# EAGLE board boost_converter3 (EAGLE 9.6.1)
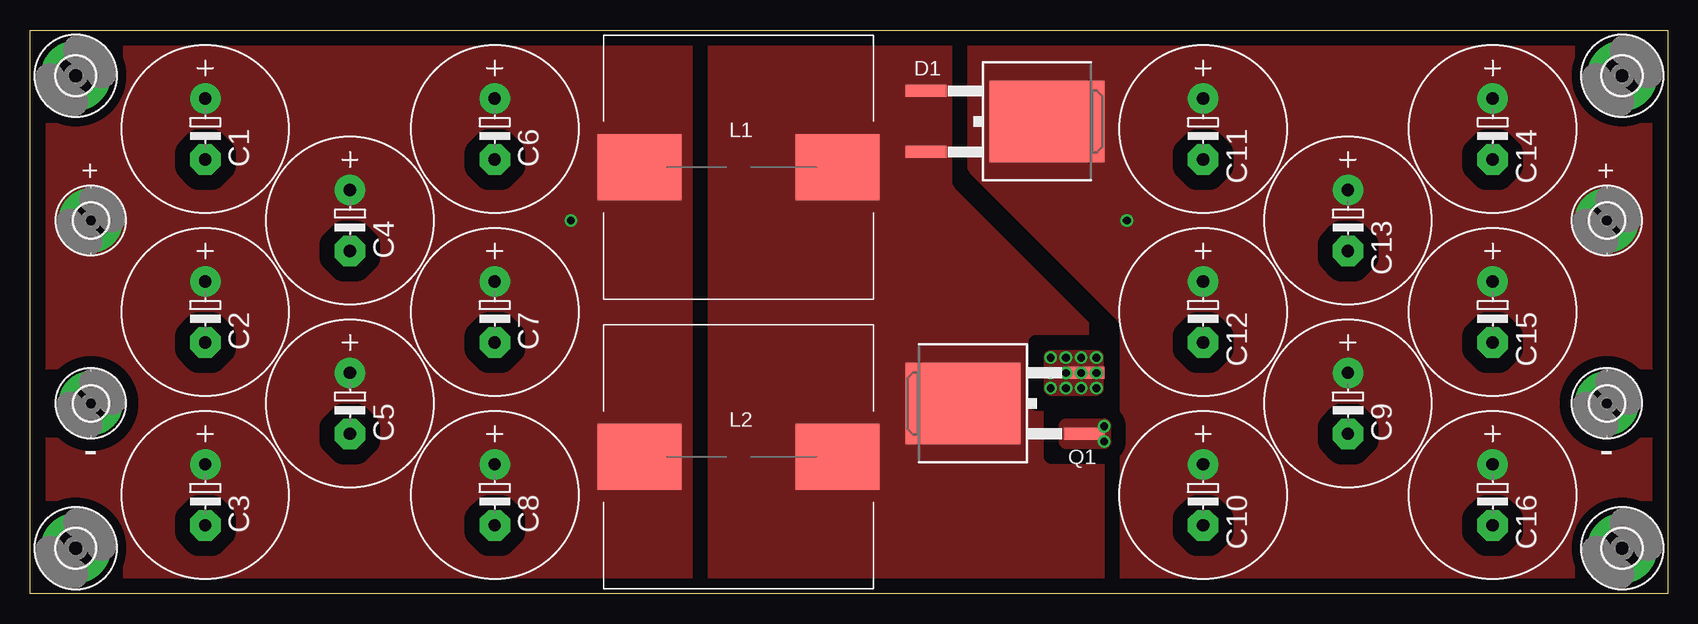
[diagram p0: board, top side]
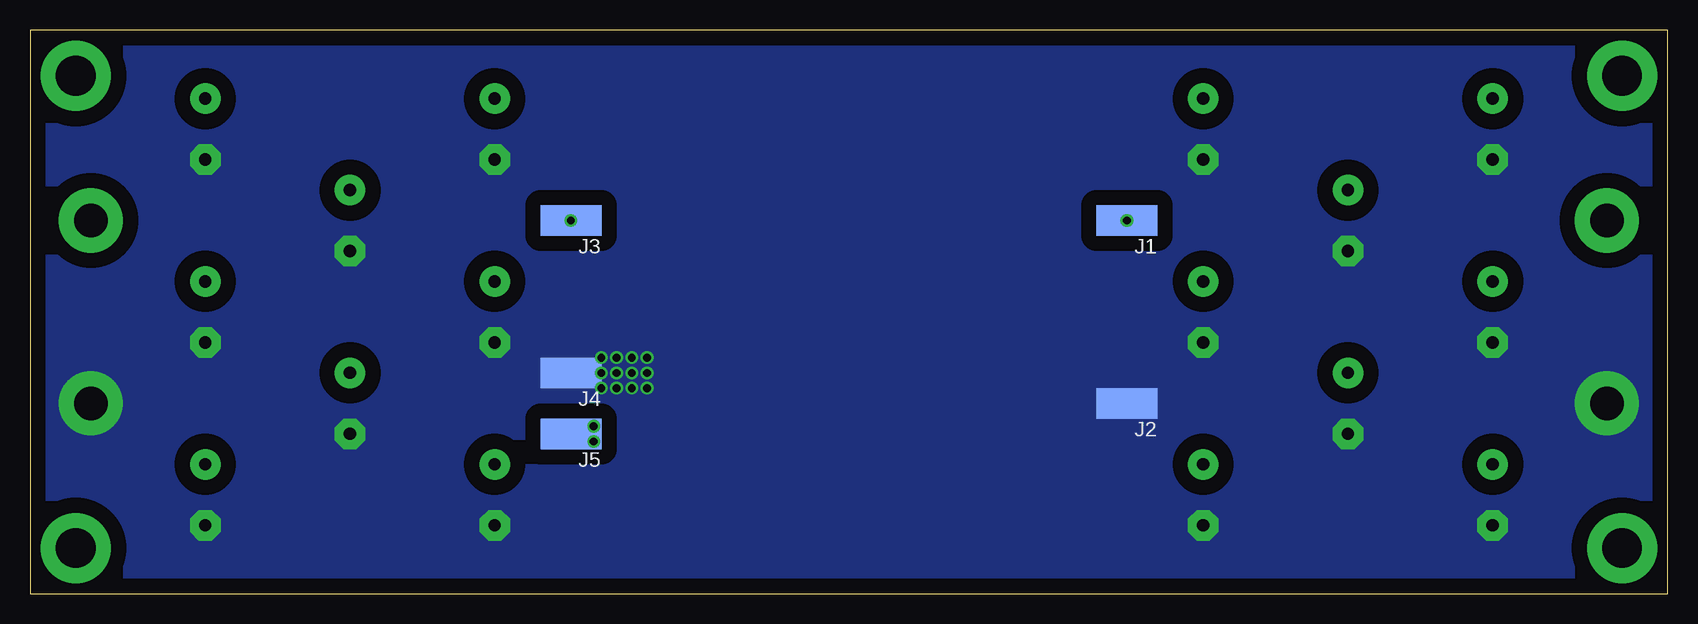
[diagram p1: board, bottom side, seen from below]

Size 136.53 x 46.99 mm. Coordinates in mm from the lower left corner, seen from the top.
Outline: 0,0 0,46.99 136.53,46.99 136.53,0 0,0
Copper layers (1*16): Top 0.035mm / dielectric 0.5mm / Bottom 0.035mm
Design rules "two_layer": minimum track width 5mil, minimum drill 10mil, track to track 5mil, track to pad 5mil, pad to pad 5mil, via to via 5mil, smd to smd 5mil, copper to edge 20mil, drill to drill 8mil, minimum pad ring 10mil, minimum via ring 8mil, stop-mask expansion 4mil, vias tented up to drill 0mil, thermal gap 10mil

## Footprints (pad centres in the part's own frame; a part is rotated, then mirrored left to right if it is on the bottom)
E5-13 = drill 1.016 pad 2.54: + -2.54,0 | drill 1.016 pad 2.54 octagon: - 2.54,0
TO263 = smd 1 x 3.4: 1 -2.54,-6.6; 2 2.54,-6.6 | smd 6.8 x 9.6: 3 0,3.5
3,3-PAD = drill 3.3 pad 5.842: B3,3 0,0
SMD2,54-5,08 = smd 2.54 x 5.08: 1 0,0
WE-HCI_2212 = smd 7 x 5.5: 1 8.25,0; 2 -8.25,0
2,8-PAD = drill 2.8 pad 5.334: B2,8 0,0

## Placement (x,y rotation side)
C1  [E5-13]  14.61,38.73 270 top
C2  [E5-13]  14.61,23.5 270 top
C3  [E5-13]  14.61,8.26 270 top
C4  [E5-13]  26.67,31.11 270 top
C5  [E5-13]  26.67,15.88 270 top
C6  [E5-13]  38.73,38.73 270 top
C7  [E5-13]  38.73,23.5 270 top
C8  [E5-13]  38.73,8.26 270 top
C9  [E5-13]  109.86,15.88 270 top
C10  [E5-13]  97.79,8.26 270 top
C11  [E5-13]  97.79,38.73 270 top
C12  [E5-13]  97.79,23.5 270 top
C13  [E5-13]  109.86,31.11 270 top
C14  [E5-13]  121.92,38.73 270 top
C15  [E5-13]  121.92,23.5 270 top
C16  [E5-13]  121.92,8.26 270 top
D1  [TO263]  81.28,39.37 270 top
E$1  [3,3-PAD]  132.72,43.18 0 top
E$2  [3,3-PAD]  132.72,3.81 0 top
E$13  [3,3-PAD]  3.81,43.18 0 top
E$14  [3,3-PAD]  3.81,3.81 0 top
J1  [SMD2,54-5,08]  45.09,31.11 90 bottom
J2  [SMD2,54-5,08]  45.09,15.88 90 bottom
J3  [SMD2,54-5,08]  91.44,31.11 90 bottom
J4  [SMD2,54-5,08]  91.44,18.41 90 bottom
J5  [SMD2,54-5,08]  91.44,13.34 90 bottom
L1  [WE-HCI_2212]  59.05,35.56 0 top
L2  [WE-HCI_2212]  59.05,11.43 0 top
P1  [2,8-PAD]  131.44,31.11 0 top
P2  [2,8-PAD]  131.44,15.88 0 top
P3  [2,8-PAD]  5.08,15.88 0 top
P4  [2,8-PAD]  5.08,31.11 0 top
Q1  [TO263]  81.28,15.88 90 top

## Library data of the parts
C1-C16 D1 Q1 = ref-packages
E$1 E$2 E$13 E$14 P1-P4 = holes
J1-J5 = wirepad
L1 L2 = Wurth_Elektronik_Passive_rev19e

## Nets
GATE: J5.1 Q1.1
GND: C1.- C2.- C3.- C4.- C5.- C6.- C7.- C8.- C9.- C10.- C11.- C12.- C13.- C14.- C15.- C16.- J2.1 J4.1 P2.B2,8 P3.B2,8 Q1.2
SW: D1.1 D1.2 L1.1 L2.1 Q1.3
VIN: C1.+ C2.+ C3.+ C4.+ C5.+ C6.+ C7.+ C8.+ J1.1 L1.2 L2.2 P4.B2,8
VOUT: C9.+ C10.+ C11.+ C12.+ C13.+ C14.+ C15.+ C16.+ D1.3 J3.1 P1.B2,8

## Tracks (layer width: path | path; a pad name or v marks a point on that pad's centre or on a via)
GATE  (via drill 0.65)
  Bottom 1.27: J5.1 90.17,13.34 v89.53,13.97
  other vias: 89.53,12.7
  pour Top (no thermals): 86.36,13.97 86.36,12.7 89.53,12.7 89.53,13.97
GND  (via drill 0.65)
  other vias: 85.09,19.68 86.36,19.68 87.63,19.68 88.9,19.68 85.09,17.14 86.36,17.14 87.63,17.14 88.9,17.14 86.36,18.41 87.63,18.41 88.9,18.41 85.09,18.41
  pour Bottom (isolate 1.27, no thermals): 0.64,46.35 0.64,0.64 135.89,0.64 135.89,46.35
  pour Top (no thermals): 85.09,19.68 85.09,17.14 88.9,17.14 88.9,19.68
SW
  pour Top (isolate 1.27, rank 2, no thermals): 45.72,46.35 45.72,0.64 91.44,0.64 91.44,46.35
VIN  (via drill 0.65)
  other vias: 45.09,31.11
  pour Top (isolate 1.27, no thermals): 0.64,46.35 54.61,46.35 54.61,0.64 0.64,0.64
VOUT  (via drill 0.65)
  other vias: 91.44,31.11
  pour Top (isolate 1.27, no thermals): 78.74,46.35 78.74,35.56 91.44,22.86 91.44,0.64 135.89,0.64 135.89,46.35

## Text on the board
tPlace: + | + | - | -